# Altium PCB PCB2.PcbDoc
Units mm, origin at the board's own origin, x right, y up, seen from the top; angles counter-clockwise.
Board outline 70 x 50 mm, 2 copper layers (Top Layer, Bottom Layer); 27 components, 22 nets, 119 pads, 4 vias.
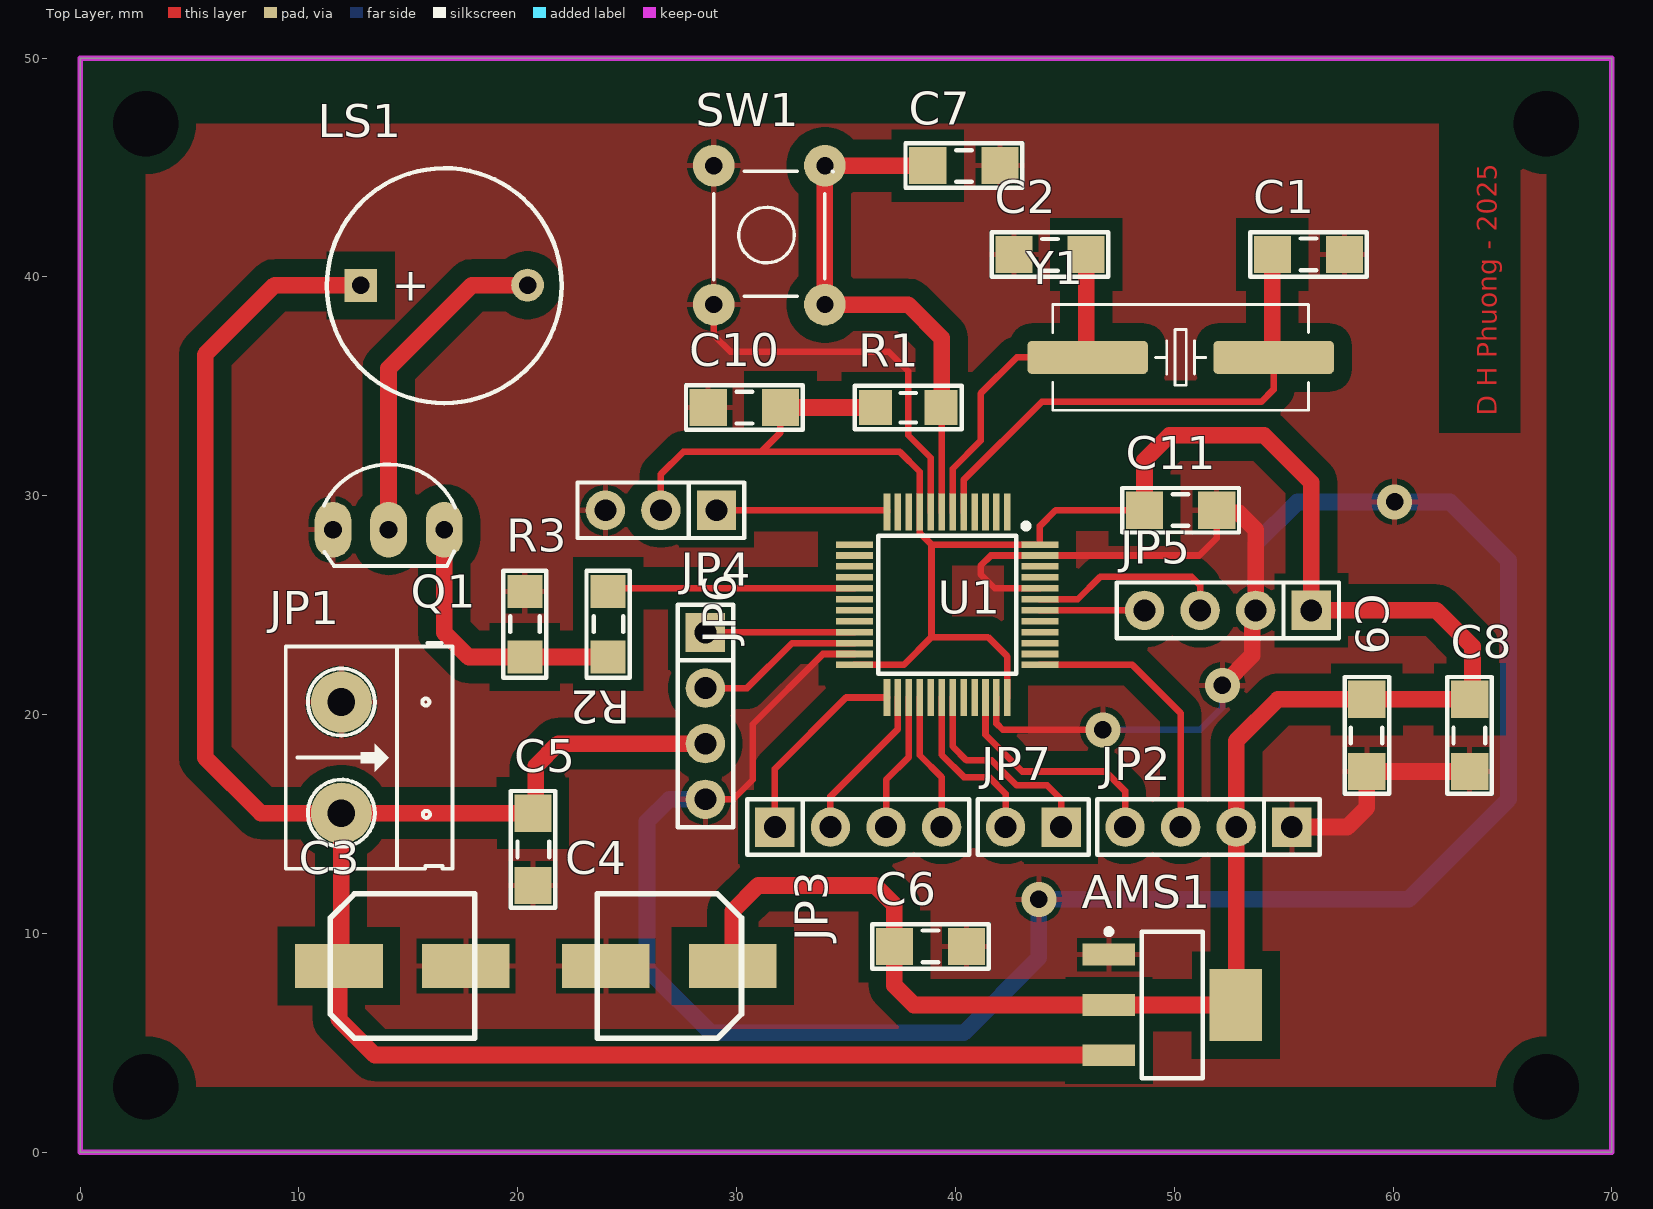
[diagram p0: Top Layer view]
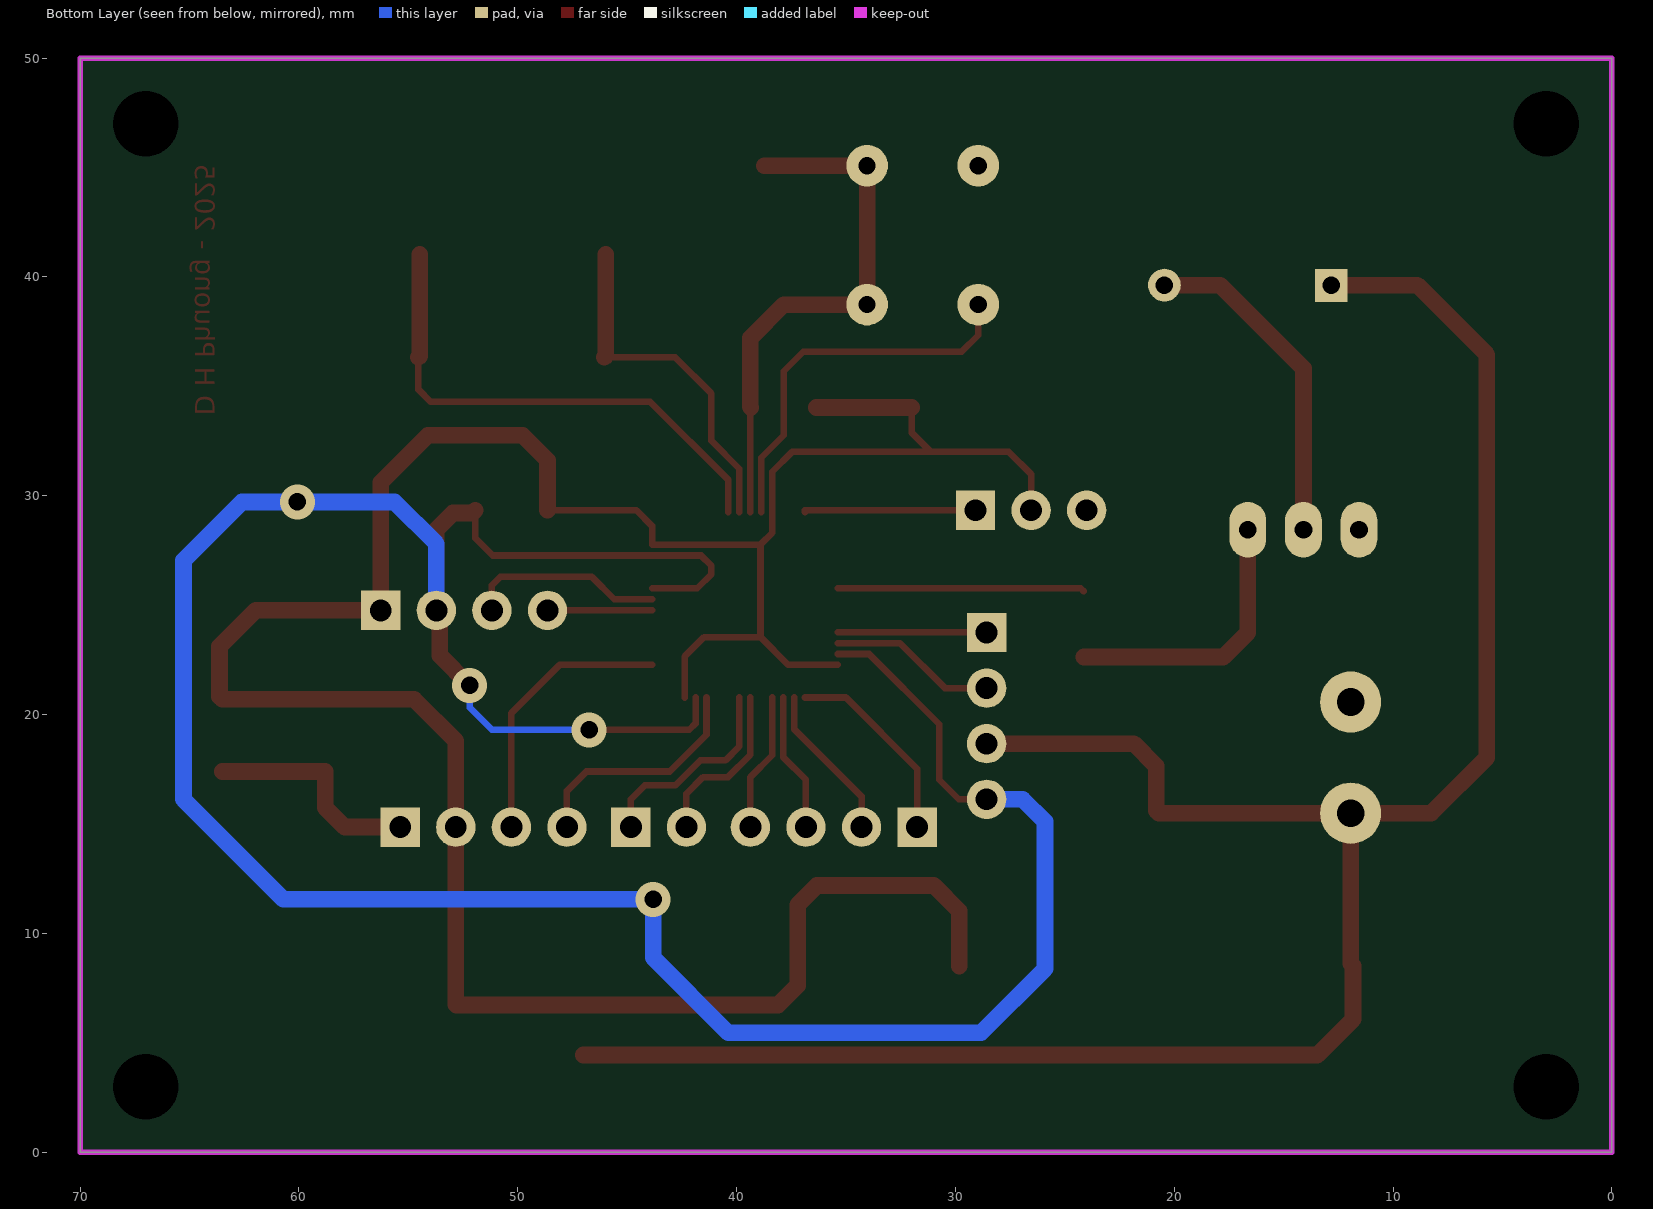
[diagram p1: Bottom Layer view, seen from below]
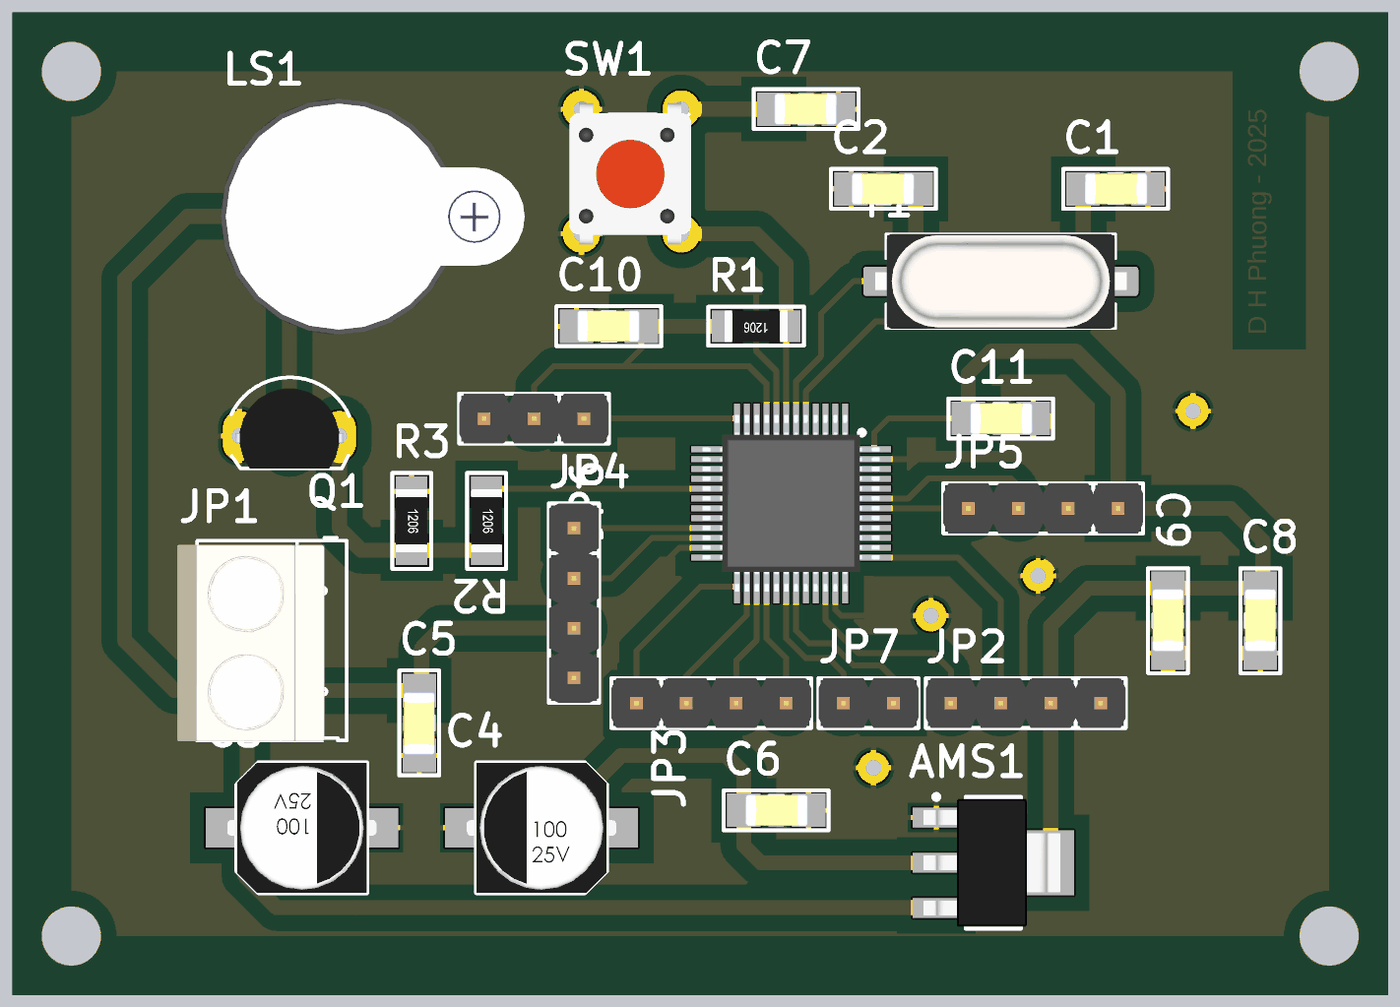
[diagram p2: 3D render of the assembled board from above, using the file's embedded part models]

## Layer stack, top to bottom
Top Solder: solder mask 0.0102, Solder Resist, Dk 3.5
Top Layer: signal copper 0.0356
Dielectric 1: dielectric 0.32, FR-4, Dk 4.8
Bottom Layer: signal copper 0.0356
Bottom Solder: solder mask 0.0102, Solder Resist, Dk 3.5

## Board outline
0,0 0,50 70,50 70,0

## Design rules (kind name [scope] priority, off if disabled: settings)
Clearance [All] p1: gap=0.8 ignorepadtopadclearanceinfootprint=FALSE
PolygonConnect [All] p1: connectstyle=Relief reliefconductorwidth=0.254 reliefentries=4 polygonreliefangle="90 Angle" airgapwidth=0.254
RoutingVias [All] p1: holewidth=0.711 width=1.27 viastyle="Through Hole" minholewidth=0.711 minwidth=1.27 maxholewidth=0.711 maxwidth=1.27
SolderMaskExpansion [All] p1: expansion=0.102 istentingtop=FALSE
Width [All] p1: maxlimit=0.762 minlimit=0.3 preferedwidth=0.508
30 further rules are at their usual default settings.

## Components (designator, comment, footprint, x,y, rotation, side; value= is the part's Value field where it differs from the comment)
AMS1 "AMS1117-3.3V" SOT223 49.911,6.731 r270 top value="AMS1117-3.3V SOT223"
C1 "22pF" "tu 1206" 56.134,41.021 r0 top
C2 "22pF" "tu 1206" 44.323,41.021 r180 top
C3 "100uF" "tu nhom 6.3 (d)" 14.732,8.509 r0 top
C4 "100uF" "tu nhom 6.3 (d)" 26.924,8.509 r180 top
C5 "104" "tu 1206" 20.701,13.843 r270 top
C6 "104" "tu 1206" 38.862,9.398 r0 top
C7 "104" "tu 1206" 40.386,45.085 r180 top
C8 "104" "tu 1206" 63.5,19.049 r90 top
C9 "104" "tu 1206" 58.801,19.05 r90 top
C10 "104" "tu 1206" 30.353,34.036 r180 top
C11 "104" "tu 1206" 50.291,29.337 r0 top
JP1 "Header 2_1" HED2 11.938,20.574 r270 top value="Header 2"
JP2 "JP 1x4 2.54" "JP 1x4 DT" 55.372,14.859 r180 top
JP3 "JP 1x4 2.54" "JP 1x4 DT" 31.75,14.859 r0 top
JP4 "JP 1x4 2.54" "JP 1x4 DT" 28.575,23.749 r270 top
JP5 "JP 1x4 2.54" "JP 1x4 DT" 56.261,24.765 r180 top
JP6 "JP 1x3 2.54" "JP 1x3 DT" 29.083,29.337 r180 top
JP7 "JP 1x2 2.54" "JP 1x2 DT" 44.831,14.859 r180 top
LS1 "Coi Chip Speaker" "Coi Chip Speacker" 12.827,39.611 r0 top
Q1 "C1815" TO92 14.097,28.448 r0 top value=C9014
R1 "10k" "tro smd 1206" 37.846,34.036 r180 top
R2 "1k" "tro smd 1206" 24.13,24.13 r270 top
R3 "10k" "tro smd 1206" 20.32,24.13 r270 top
SW1 "SW" SW4 28.956,38.735 r90 top value="Button chip 4 pin"
U1 "STM32F103C8T6" LQFP-48_19.6_393_58X11_SMD 39.624,25.019 r270 top
Y1 "8Mhz" "Thach Anh 2 chan SMD" 50.292,36.322 r180 top value=4Mhz

## Footprints (in the part's own frame and the unit in brackets; to place one, negate y for a bottom-side part, rotate by r counter-clockwise, add the part's x,y. Pads: shape width x height; smd on the part's side, far side on the other; paste and mask are expansions set on the pad)
"Coi Chip Speacker" [mm]
  rect 1.5x1.5 hole 0.8: 1(0,0)
  round 1.5 hole 0.8: 2(7.62,0.013)
  silkscreen extent -1.55,-5.38 9.18,5.36, body extent -2.22,-6 13.24,6, height 4.5
HED2 [mil] "Header 2, 2 pin, hight 300mil, Pin to Pin 200, Colour Green"
  round 110 hole 50: 1(0,0) 2(200,0)
  silkscreen extent -106,-100 300,200, body extent -92,-140 302,155, height 394
"JP 1x2 DT" [mm] "2 pins, 1 row, straight, gold plating"
  rect 1.8x1.8 hole 1: 1(0,0)
  round 1.8 hole 1: 2(2.54,0)
  silkscreen extent -1.27,-1.27 3.81,1.27, body extent -1.27,-1.27 3.81,1.27, height 8.54
"JP 1x3 DT" [mm]
  rect 1.8x1.8 hole 1: 1(0,0)
  round 1.8 hole 1: 2(2.54,0) 3(5.08,0)
  silkscreen extent -1.27,-1.27 6.35,1.27, body extent -1.27,-1.27 6.35,1.27, height 8.54
"JP 1x4 DT" [mm] "4 pins, 1 row, straight, gold plating"
  rect 1.8x1.8 hole 1: 1(0,0)
  round 1.8 hole 1: 2(2.54,0) 3(5.08,0) 4(7.62,0)
  silkscreen extent -1.27,-1.27 8.89,1.27, body extent -1.27,-1.27 8.89,1.27, height 8.54
LQFP-48_19.6_393_58X11_SMD [mm] "48LQFP"
  rect 1.7x0.3 smd mask+0.076: 1(-4.238,2.75) 2(-4.238,2.25) 3(-4.238,1.75) 4(-4.238,1.25) 5(-4.238,0.75) 6(-4.238,0.25) 7(-4.238,-0.25) 8(-4.238,-0.75) 9(-4.238,-1.25) 10(-4.238,-1.75) 11(-4.238,-2.25) 12(-4.238,-2.75) 25(4.238,-2.75) 26(4.238,-2.25) 27(4.238,-1.75) 28(4.238,-1.25) 29(4.238,-0.75) 30(4.238,-0.25) 31(4.238,0.25) 32(4.238,0.75) 33(4.238,1.25) 34(4.238,1.75) 35(4.238,2.25) 36(4.238,2.75)
  rect 0.3x1.7 smd mask+0.076: 13(-2.75,-4.238) 14(-2.25,-4.238) 15(-1.75,-4.238) 16(-1.25,-4.238) 17(-0.75,-4.238) 18(-0.25,-4.238) 19(0.25,-4.238) 20(0.75,-4.238) 21(1.25,-4.238) 22(1.75,-4.238) 23(2.25,-4.238) 24(2.75,-4.238) 37(2.75,4.238) 38(2.25,4.238) 39(1.75,4.238) 40(1.25,4.238) 41(0.75,4.238) 42(0.25,4.238) 43(-0.25,4.238) 44(-0.75,4.238) 45(-1.25,4.238) 46(-1.75,4.238) 47(-2.25,4.238) 48(-2.75,4.238)
  silkscreen extent -3.72,-3.15 3.15,3.73, body extent -4.5,-4.5 4.5,4.5, height 1.7
SOT223 [mm]
  rect 1x2.4 smd: 1(-2.3,-2.9) 2(0,-2.9) 3(2.3,-2.9)
  rect 3.3x2.4 smd: 4(0,2.9)
  silkscreen extent -3.47,-3.02 3.35,1.4, body extent -3.25,-3.56 3.25,3.4, height 1.68
SW4 [mil] "SW button 4pin, 250 x250 mil"
  round 75 hole 31: 1(0,0) 2(250,-200) 3(250,0) 4(0,-200)
  silkscreen extent 15,-215 240,0, body extent -36,-220 276,24, height 276
"Thach Anh 2 chan SMD" [mm] "SMD Crystal HC49/US-SM package"
  round 0.508 on Mech15: 0(0,0)
  rrect25% 5.5x1.5 smd: 1(-4.25,0) 2(4.25,0)
  silkscreen extent -5.84,-2.41 5.84,2.41, body extent -6.4,-2.41 6.4,2.42, height 4.29
TO92 [mil] "TO-92"
  oval 66x100 hole 32: 1(-100,0) 2(0,0) 3(100,0)
  silkscreen extent -117,-65 120,118, body extent -109,-66 109,95, height 245
"tro smd 1206" [mm]
  rect 1.5x1.6 smd: 1(-1.5,0) 2(1.5,0)
  silkscreen extent -2.44,-0.99 2.44,0.99, body extent -1.6,-0.8 1.6,0.8, height 0.6
"tu 1206" [mm]
  rect 1.7x1.7 smd: 1(-1.65,0) 2(1.65,0)
  silkscreen extent -2.67,-1.02 2.67,1.02, body extent -1.57,-0.8 1.63,0.8, height 0.94
"tu nhom 6.3 (d)" [mm]
  rect 4x2 smd: 1(-2.9,0) 2(2.9,0)
  silkscreen extent -3.3,-3.3 3.3,3.3, body extent -3.8,-3.3 3.8,3.3, height 8

## Part data
AMS1: library part "AMS1117 SMD", "Dán", Chung_Loai=Dán, Don_Vi=Con, Ma_Hang=MH000596
C1 C2: library part "Tu 1206 22pF 50V 10%", "Dán", Chung_Loai=Dán, Don_Vi=Con, Ma_Hang=MH004547, So_Chan=2, Ten_Linh_Kien="Tụ 1206 22P 10% 50V"
C3 C4: library part "Tu Nhom 100uF 16V", "Dán", Chung_Loai=Dán, Don_Vi=Con, Ma_Hang=MH002219, So_Chan=2, Ten_Linh_Kien="Tụ Nhôm 100uF 16V 6.3x5.4MM"
C5 C6 C7 C8 C9 C10 C11: library part "Tu 1206 104 50V 20%", "Dán", Chung_Loai=Dán, Don_Vi=Con, Ma_Hang=MH004544, So_Chan=2, Ten_Linh_Kien="Tụ 1206 104-0.1uF 20% 50V"
JP1: "Header, 2-Pin", Manufacturer="Generic Components", Class=Connector
JP2 JP3 JP4 JP5: library part "JP 1x4 2.54 Duc Thang", "Cắm", Chung_Loai=Cắm, Don_Vi=Con, Ma_Hang=MH000903, Ten_Linh_Kien="Jump Đơn Đực 2.54MM 1x40P Thẳng 11MM"
JP6: library part "JP 1x3 2.54 Duc Thang", "Cắm", Chung_Loai=Cắm, Don_Vi=Con, Ma_Hang=MH000903, Ten_Linh_Kien="Jump Đơn Đực 2.54MM 1x40P Thẳng 11MM"
JP7: library part "JP 1x2 2.54 Duc Thang", "Cắm", Chung_Loai=Cắm, Don_Vi=Con, Ma_Hang=MH000903, Ten_Linh_Kien="Jump Đơn Đực 2.54MM 1x40P Thẳng 11MM"
LS1: "Còi chip"
Q1: library part "Trans C1815 DIP", "NPN transistor"
R1 R3: library part "Tro 1206 1% 10k", "Dán", Chung_Loai=Dán, Don_Vi=Con, Ma_Hang=MH005885, So_Chan=2, Ten_Linh_Kien="Trở 1206 1% 10k"
R2: library part "Tro 1206 1% 1k", "Dán", Chung_Loai=Dán, Don_Vi=Con, Ma_Hang=MH005880, So_Chan=2, Ten_Linh_Kien="Trở 1206 1% 1k"
SW1: library part SW4, "Switch button 4 pin"
U1: library part IC_STM32F103C8T6, "ARM® Cortex®-M3 STM32F1 Microcontroller IC 32-Bit 72MHz 64KB (64K x 8) FLASH 48-LQFP (7x7)", Alternate Part Number-1=NA, Case/Package=LQFP48, Manufacturer=STMicroelectronics, Manufacturer Part Number=STM32F103C8T6, Supplier Part Number-1=STM32F103C8T6, Supplier-1=LCSC
Y1: library part "Thach Anh 2 chan SMD", "Crystal For all Crystal 2pin."

## Free pads (board coordinates)
  round 1.524 hole 3: q(3,3) q(3,47) q(67,3) q(67,47)

## Via types
v1: diameter 1.6, hole 0.8, Top Layer to Bottom Layer, 4 vias

## Nets (pads, with @x,y where several pads share a name; then routed paths per layer and width w, separated by ;. In a path a pad name is that pad's centre, name@x,y a point inside that pad or via, vN(x,y) a via of type N, cw(c..) or ccw(c..) an arc to the next point about the centre after c; other vN are vias at no path point)
+3.3: AMS1.2 AMS1.4 C4.1 C6.1 C8.2 C9.2 C10.1 C11.1 JP2.2 JP5.1 JP6.2 R1.2 U1.9 U1.24 U1.36 U1.48 | length 131
  Top Layer w0.3: JP6.2 26.543,30.988 27.559,32.004 31.115,32.004 ; C10.1 32.003,32.892 31.115,32.004 ; U1.24 37.636,22.269 38.906,23.539 ; U1.36 42.374,22.65 41.485,23.539 38.906,23.539 ; C11.1 44.577,29.337 43.862,28.622 U1.48 38.906,27.769 ; 31.115,32.004 37.465,32.004 38.374,31.095 U1.9 38.374,28.301 38.906,27.769 ; 38.906,23.539 38.906,27.769
  Top Layer w0.762: C4.1 29.824,11.028 30.988,12.192 36.322,12.192 37.212,11.302 C6.1 37.212,7.619 38.1,6.731 AMS1.2 AMS1.4 52.832,6.752 JP2.2 52.832,18.796 54.736,20.7 C9.2 C8.2 63.627,20.827 63.627,23.114 61.976,24.765 JP5.1 56.261,30.607 54.102,32.766 49.784,32.766 48.641,31.623 C11.1 ; C10.1 R1.2
+5: AMS1.3 C3.1 C5.1 JP1.2 JP4.3 LS1.1 | length 98.6
  Top Layer w0.762: LS1.1 12.814,39.624 8.89,39.624 5.715,36.449 5.715,18.034 8.255,15.494 JP1.2 ; C5.1 20.828,15.62 20.828,17.653 21.844,18.669 JP4.3 ; C5.1 JP1.2 ; AMS1.3@47.011,4.445 13.462,4.445 11.832,6.075 C3.1 11.938,8.615 JP1.2
BTN_CONFIRM: JP3.1 U1.25 | length 9.1
  Top Layer w0.3: JP3.1 31.75,17.526 35.005,20.781 U1.25
BTN_DOWN: JP3.4 U1.28 | length 6.3
  Top Layer w0.3: U1.28 38.374,18.141 39.37,17.145 JP3.4
BTN_FUNC: JP3.2 U1.26 | length 7.2
  Top Layer w0.3: JP3.2 34.29,16.256 37.374,19.34 U1.26
BTN_UP: JP3.3 U1.27 | length 6.4
  Top Layer w0.3: JP3.3 36.83,17.018 37.874,18.062 U1.27
BUZZER_ALARM: R2.1 U1.17 | length 11.3
  Top Layer w0.3: R2.1 24.269,25.769 U1.17
DHT11_CONTROL: JP6.1 U1.12 | length 7.9
  Top Layer w0.3: JP6.1 36.874,29.337 U1.12
DS1307_SCL: JP4.1 U1.21 | length 6.8
  Top Layer w0.3: JP4.1 28.595,23.769 U1.21
DS1307_SDA: JP4.2 U1.22 | length 7.7
  Top Layer w0.3: JP4.2 30.48,21.209 32.54,23.269 U1.22
GND: AMS1.1 C1.2 C2.2 C3.2 C4.2 C5.2 C6.2 C7.1 C8.1 C9.1 C10.2 C11.2 JP1.1 JP2.1 JP4.4 JP5.2 JP6.3 Q1.1 R3.1 SW1.1 SW1.3 U1.8 U1.23 U1.35 U1.44 U1.47 | length 161.7
  Top Layer w0.3: JP4.4 29.845,16.129 30.734,17.018 30.734,19.558 33.945,22.769 U1.23 ; SW1.1 28.956,37.338 29.718,36.576 36.957,36.576 37.846,35.687 37.846,32.766 38.874,31.738 U1.8 ; U1.35 41.874,19.594 42.164,19.304 v1(46.736,19.304) ; U1.44 41.795,25.769 41.148,26.416 41.148,26.797 41.62,27.269 U1.47 51.145,27.269 51.943,28.067 51.943,29.335 C11.2
  Top Layer w0.762: C11.2@51.943,29.335 52.068,29.21 52.959,29.21 53.721,28.448 JP5.2 53.561,24.605 53.561,22.7 v1(52.197,21.336) ; JP2.1 57.912,14.859 58.801,15.748 C9.1 ; C9.1 C8.1
  Bottom Layer w0.3: v1(46.736,19.304) 51.181,19.304 52.197,20.32 v1(52.197,21.336)
  Bottom Layer w0.762: JP4.4 26.924,16.129 25.908,15.113 25.908,8.382 28.829,5.461 40.386,5.461 43.815,8.89 v1(43.815,11.557) 60.706,11.557 65.278,16.129 65.278,27.051 62.611,29.718 v1(60.071,29.718) 55.626,29.718 53.721,27.813 JP5.2
NetLS1_2: LS1.2 Q1.2 | length 15.3
  Top Layer w0.762: Q1.2 14.097,35.814 17.907,39.624 LS1.2
NetQ1_3: Q1.3 R2.2 R3.2 | length 12.7
  Top Layer w0.762: Q1.3 16.637,23.749 17.756,22.63 R3.2 R2.2
NRST: C7.2 R1.1 SW1.2 SW1.4 U1.7 | length 25
  Top Layer w0.3: R1.1 39.374,34.008 U1.7
  Top Layer w0.762: C7.2 SW1.2 SW1.4 37.846,38.735 39.37,37.211 39.37,34.06 R1.1
OLED_SCL: JP5.4 U1.42 | length 4.8
  Top Layer w0.3: U1.42 48.637,24.769 JP5.4
OLED_SDA: JP5.3 U1.43 | length 9.2
  Top Layer w0.3: U1.43 45.589,25.269 46.609,26.289 50.8,26.289 51.181,25.908 JP5.3 JP5.3@51.054,24.892
RX1: JP7.1 U1.31 | length 9.5
  Top Layer w0.3: U1.31 39.874,18.546 40.513,17.907 41.656,17.907 42.799,16.764 44.196,16.764 44.831,16.129 JP7.1
SWCLK: JP2.3 U1.37 | length 12.5
  Top Layer w0.3: U1.37 48.089,22.269 50.292,20.066 JP2.3
SWDIO: JP2.4 U1.34 | length 10.8
  Top Layer w0.3: U1.34 41.374,19.078 43.053,17.399 46.863,17.399 47.752,16.51 JP2.4
TX1: JP7.2 U1.30 | length 7.8
  Top Layer w0.3: U1.30 39.374,18.157 40.386,17.145 41.529,17.145 42.291,16.383 JP7.2
X0: C1.1 U1.5 Y1.1 | length 23.5
  Top Layer w0.3: U1.5 40.374,30.722 43.942,34.29 53.975,34.29 54.542,34.857 Y1.1
  Top Layer w0.762: C1.1 54.484,36.38 Y1.1
X1: C2.1 U1.6 Y1.2 | length 16.2
  Top Layer w0.3: U1.6 39.874,31.238 41.148,32.512 41.148,34.671 42.799,36.322 Y1.2
  Top Layer w0.762: C2.1 45.973,36.391 Y1.2
pads on no net: U1.1 U1.2 U1.3 U1.4 U1.10 U1.11 U1.13 U1.14 U1.15 U1.16 U1.18 U1.19 U1.20 U1.29 U1.32 U1.33 U1.38 U1.39 U1.40 U1.41 U1.45 U1.46 Y1.0

## Polygon pours and split planes (outlines as drawn)
GND on Top Layer "GND_L01_P000" (solid, remove dead copper, pour order 0): 3,47 67,47 67,3 3,3

## Keep-outs
Keep-Out Layer:
  the board outline again, w0.254

## Other copper
Top Layer:
  text "D H Phuong - 2025" at 65.024,33.655 h1.52 r90

## Text inside footprints (layer, text, board x,y; h text height)
LS1: Top Overlay "+" at 14.237,38.9 h1.52